# Altium PCB L293.PcbDoc
Units mm, origin at the board's own origin, x right, y up, seen from the top; angles counter-clockwise.
Board outline 39.88 x 31.91 mm, 2 copper layers (Top Layer, Bottom Layer); 22 components, 16 nets, 58 pads, 63 vias.
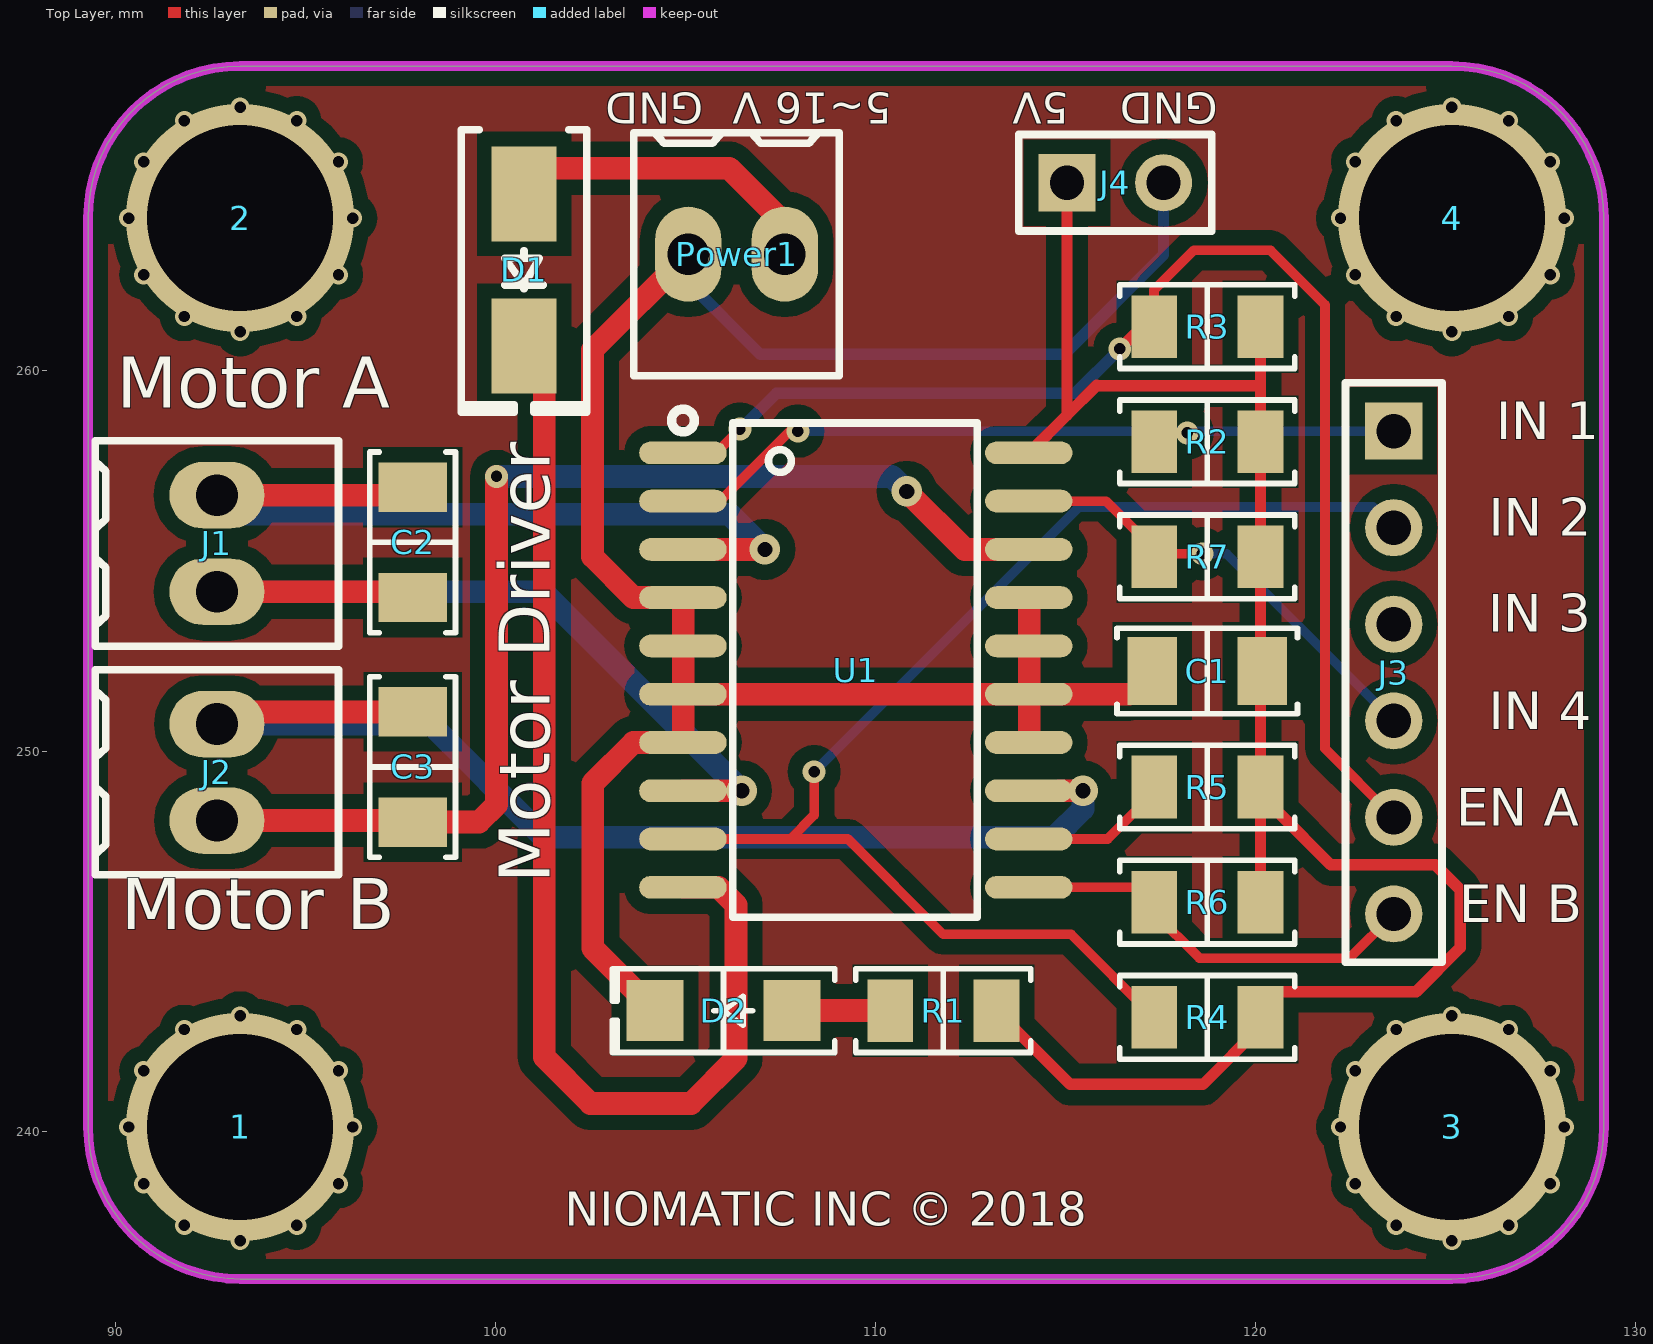
[diagram p0: Top Layer view]
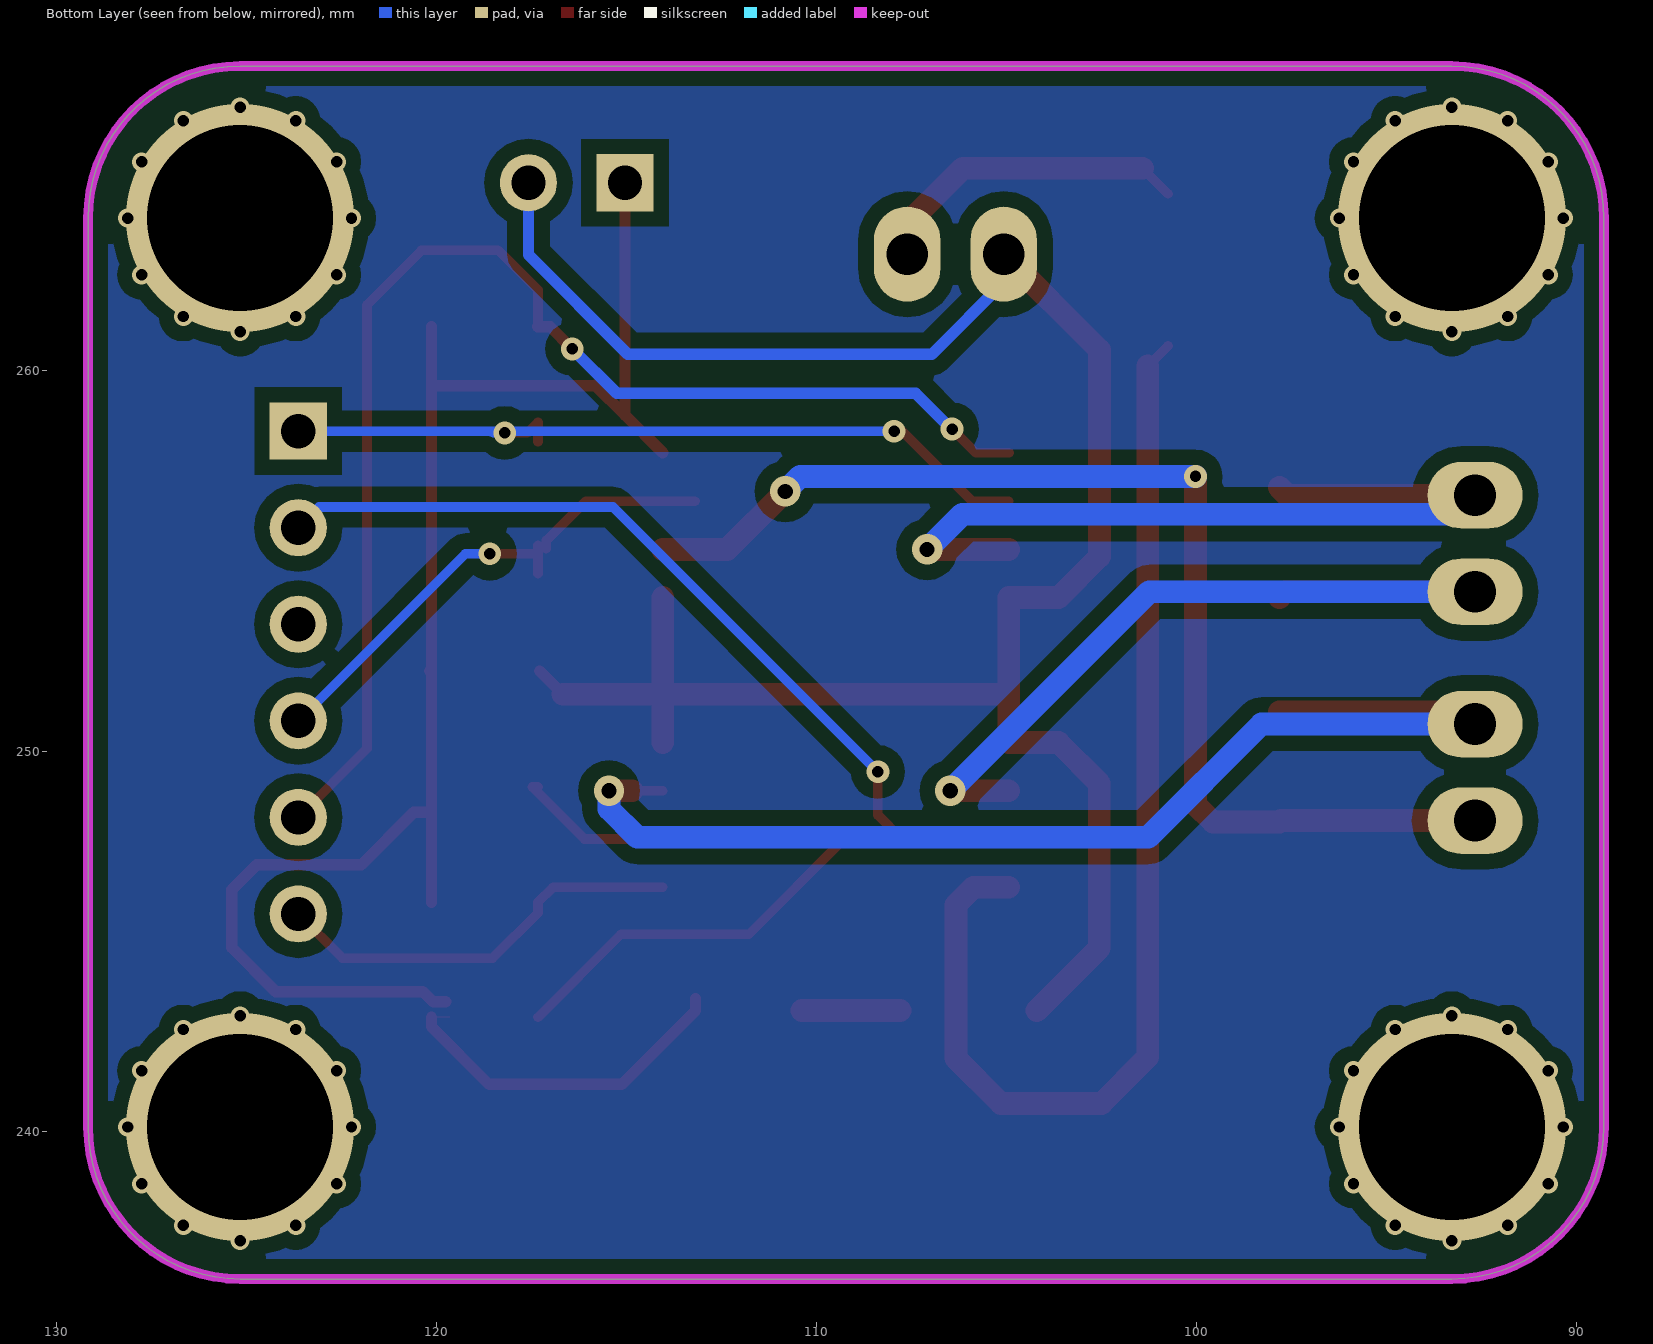
[diagram p1: Bottom Layer view, seen from below]
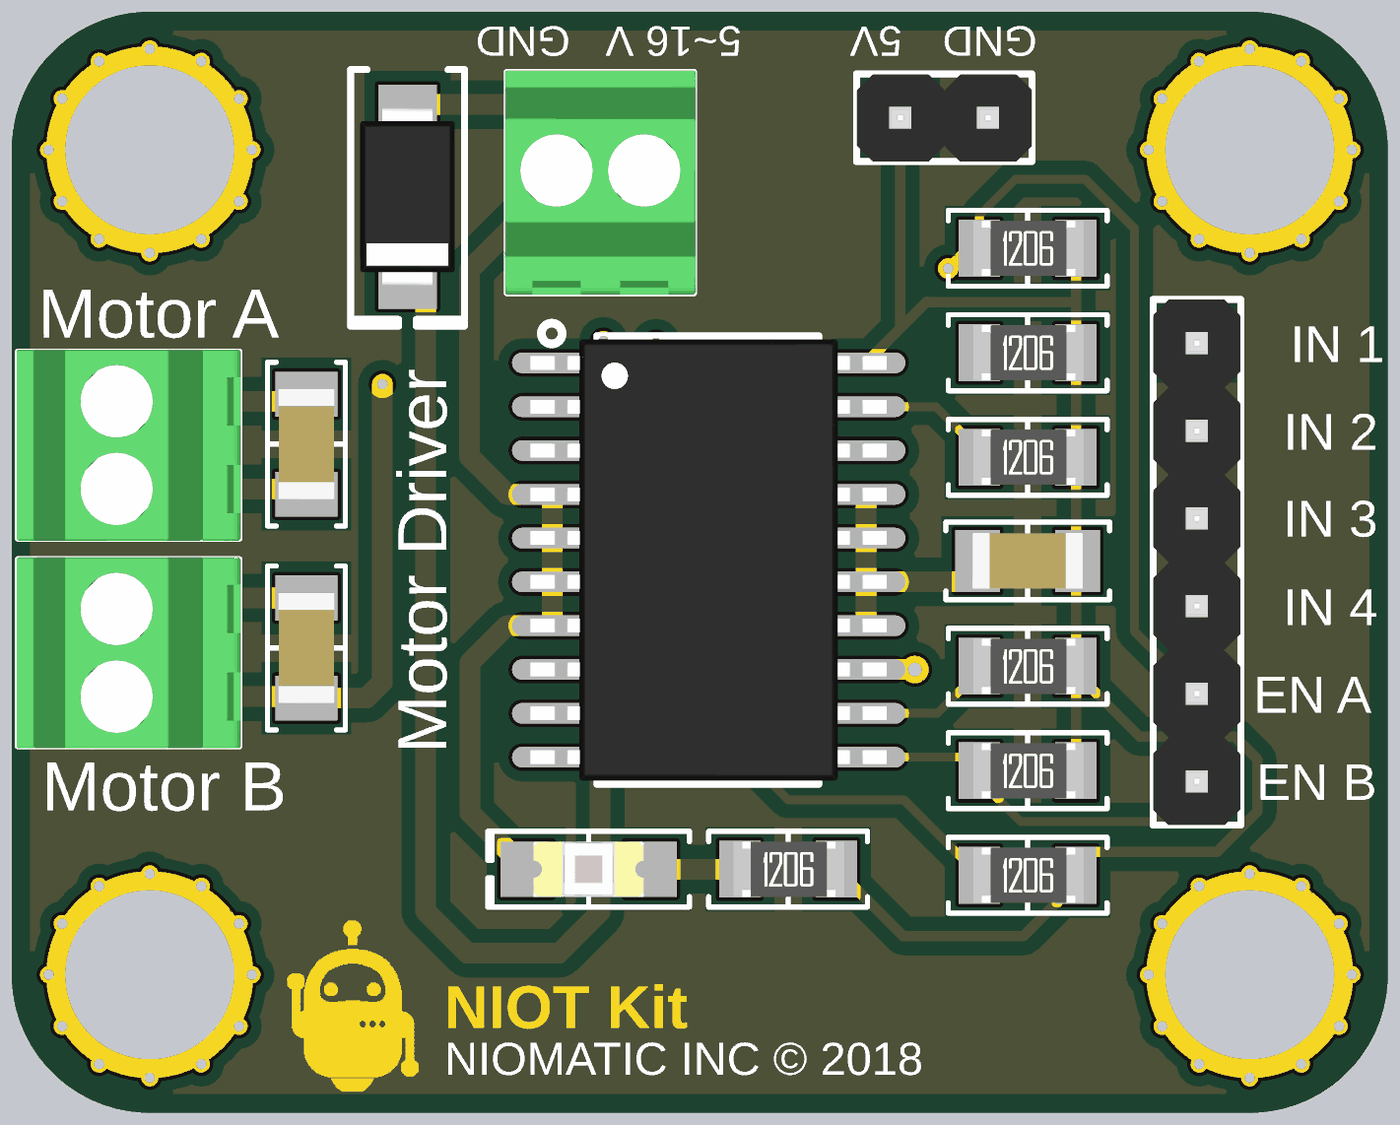
[diagram p2: 3D render of the assembled board from above, using the file's embedded part models]

## Layer stack, top to bottom
Top Solder: solder mask 0.0102, Solder Resist, Dk 3.5
Top Layer: signal copper 0.0356
Dielectric 1: dielectric 0.32, FR-4, Dk 4.8
Bottom Layer: signal copper 0.0356
Bottom Solder: solder mask 0.0102, Solder Resist, Dk 3.5

## Board outline
89.281,240.11 89.281,264.02 cw(c93.281,264.02) 93.281,268.02 125.16,268.02 cw(c125.16,264.02) 129.16,264.02 129.16,240.11 cw(c125.16,240.11) 125.16,236.11 93.281,236.11 cw(c93.281,240.11)

## Design rules (kind name [scope] priority, off if disabled: settings)
Clearance [All] p1: gap=0.4 ignorepadtopadclearanceinfootprint=FALSE
PolygonConnect [All] p1: connectstyle=Relief reliefconductorwidth=0.254 reliefentries=4 polygonreliefangle="90 Angle" airgapwidth=0.254
RoomDefinition L293 [InComponentClass('L293')] p1: confinementstyle=ConfineIn formatcopy=TRUE lockcomponents=FALSE outline 124.943,58.154 144.247,58.154 144.247,75.807 124.943,75.807
RoutingVias [All] p1: holewidth=0.3 width=0.6 viastyle="Through Hole" minholewidth=0.3 minwidth=0.6 maxholewidth=0.3 maxwidth=0.6
SMDNeckDown [All] p1: percent=50.000
SolderMaskExpansion [All] p1: expansion=0.102
UnConnectedPin [All] p1:
UnRoutedNet [All] p1: checkbadconnections=TRUE
Width [InNet('GND')] p1: maxlimit=0.3 minlimit=0.3 preferedwidth=0.3
Width Width_1 [InNet('VDD5V')] p2: maxlimit=0.3 minlimit=0.3 preferedwidth=0.3
Width Width_2 [InNet('VDD3V3')] p3: maxlimit=0.3 minlimit=0.3 preferedwidth=0.3
Width Width_3 [InNet('No Net')] p4: maxlimit=0.2 minlimit=0.2 preferedwidth=0.2
29 further rules are at their usual default settings.

## Components (designator, comment, footprint, x,y, rotation, side; value= is the part's Value field where it differs from the comment)
1 "Lego" "Lego Hole" 93.281,240.11 r90 top locked
2 "Lego" "Lego Hole" 93.281,264.02 r90 top locked
3 "Lego" "Lego Hole" 125.16,240.11 r90 top locked
4 "Lego" "Lego Hole" 125.16,264.02 r90 top locked
C1 "100nF" "CAP 1206/3216" 118.725,252.105 r0 top value=0.1uF
C2 "100nF" "CAP 1206/3216" 97.82,255.49 r90 top value=0.1uF
C3 "100nF" "CAP 1206/3216" 97.82,249.58 r90 top value=0.1uF
D1 "SS34" "DO214AC SMA" 100.75,262.66 r270 top
D2 "Green" "LED 1206/3216 RED" 106,243.17 r180 top
J1 "2 Pin" "TE 282834-2" 92.67,255.46 r90 top
J2 "2 Pin" "TE 282834-2" 92.67,249.44 r90 top
J3 "6 Pin" "HDR 1X6" 123.63,258.415 r270 top
J4 "2 Pin" "HDR 1X2" 115.034,264.95 r0 top
Power1 "Power" "TE 282834-2" 106.34,263.07 r0 top
R1 "1K" "RES 1206/3216" 111.78,243.17 r0 top
R2 "2K" "RES 1206/3216" 118.725,258.137 r0 top value=1K
R3 "2K" "RES 1206/3216" 118.725,261.165 r0 top value=1K
R4 "2K" "RES 1206/3216" 118.725,242.995 r0 top value=1K
R5 "2K" "RES 1206/3216" 118.725,249.052 r0 top value=1K
R6 "2K" "RES 1206/3216" 118.725,246.023 r0 top value=1K
R7 "2K" "RES 1206/3216" 118.725,255.108 r0 top value=1K
U1 "L293DD" SOIC127P1030-20N 109.48,252.13 r0 top

## Footprints (in the part's own frame and the unit in brackets; to place one, negate y for a bottom-side part, rotate by r counter-clockwise, add the part's x,y. Pads: shape width x height; smd on the part's side, far side on the other; paste and mask are expansions set on the pad)
"CAP 1206/3216" [mm] "Chip Capacitor, 2-Leads, Body 3.25x1.60mm, IPC Medium Density"
  rect 1.3x1.8 smd: 1(-1.45,0) 2(1.45,0)
  silkscreen extent -2.37,-1.12 2.37,1.12, body extent -1.6,-0.81 1.6,0.81, height 1.62
"DO214AC SMA" [mm] "Molded Diode, 2-Leads, Body 4.30x2.60mm, IPC Medium Density"
  rect 2.5x1.7 smd: 1(-2,0) 2(2,0)
  silkscreen extent -3.68,-1.65 3.75,1.65, body extent -2.6,-1.37 2.6,1.37, height 2.4
"HDR 1X2" [mm] "Connector; Header; 2 Position"
  rect 1.5x1.5 hole 0.9: 1(0,0)
  round 1.5 hole 0.9: 2(2.54,0)
  silkscreen extent -1.27,-1.27 3.81,1.27, body extent -1.26,-1.27 3.81,1.26, height 8.51
"HDR 1X6" [mm] "Connector; Header; 6 Position"
  rect 1.5x1.5 hole 0.9: 1(0,0)
  round 1.5 hole 0.9: 2(2.54,0) 3(5.08,0) 4(7.62,0) 5(10.16,0) 6(12.7,0)
  silkscreen extent -1.27,-1.27 13.97,1.27, body extent -1.26,-1.27 13.97,1.26, height 8.51
"LED 1206/3216 RED" [mm] "Chip Diode, 2-Leads, Body 3.13x1.55mm, IPC Medium Density"
  rect 1.5x1.6 smd: 1(-1.8,0) 2(1.8,0)
  silkscreen extent -2.92,-1.1 2.92,1.1, body extent -1.6,-0.8 1.6,0.8, height 0.9
"Lego Hole" [mm]
"RES 1206/3216" [mm] "Chip Resistor, 2-Leads, Body 3.13x1.55mm, IPC Medium Density"
  rect 1.2x1.65 smd: 1(-1.4,0) 2(1.4,0)
  silkscreen extent -2.3,-1.1 2.3,1.1, body extent -1.57,-0.8 1.62,0.8, height 0.6
SOIC127P1030-20N [mm] "SOIC, 20-Leads, Body 12.8x7.5mm, Pitch 1.27mm, IPC Medium Density"
  oval 2.3x0.6 smd: 1(-4.55,5.715) 2(-4.55,4.445) 3(-4.55,3.175) 4(-4.55,1.905) 5(-4.55,0.635) 6(-4.55,-0.635) 7(-4.55,-1.905) 8(-4.55,-3.175) 9(-4.55,-4.445) 10(-4.55,-5.715) 11(4.55,-5.715) 12(4.55,-4.445) 13(4.55,-3.175) 14(4.55,-1.905) 15(4.55,-0.635) 16(4.55,0.635) 17(4.55,1.905) 18(4.55,3.175) 19(4.55,4.445) 20(4.55,5.715)
  silkscreen extent -4.85,-6.5 3.19,6.86, body extent -5.16,-6.4 5.16,6.4, height 2.65
"TE 282834-2" [mm]
  oval 1.75x2.5 hole 1.1: 1(-1.27,0) 2(1.27,0)
  silkscreen extent -2.7,-3.2 2.7,3.2, body extent -2.77,-3.25 2.77,3.25, height 10

## Part data
C1 C2 C3: library part Capacitor, "SMT Capacitor"
D1: library part Diode, "Rectifier Diode"
D2: library part LED, "Chip LED"
Power1: library part "2 Pin"
R1 R2 R3 R4 R5 R6 R7: library part Resistor, "SMT Resistor"
U1: "IC MOTOR DRIVER PAR 20-SOIC", Package="SOIC-20 STMicroelectronics", Availability=Good, MF=STMicroelectronics, MP=L293DD, Price="3.02 USD"

## Via types
v1: diameter 0.5, hole 0.3, Top Layer to Bottom Layer, 48 vias
v2: diameter 0.6, hole 0.3, Top Layer to Bottom Layer, 7 vias
v3: diameter 6, hole 4.9, Top Layer to Bottom Layer, 4 vias
v4: diameter 0.8, hole 0.4, Top Layer to Bottom Layer, 4 vias

## Nets (pads, with @x,y where several pads share a name; then routed paths per layer and width w, separated by ;. In a path a pad name is that pad's centre, name@x,y a point inside that pad or via, vN(x,y) a via of type N, cw(c..) or ccw(c..) an arc to the next point about the centre after c; other vN are vias at no path point)
"EN A": J3.5 R3.1 U1.1 | length 34.5
  Top Layer w0.254: U1.1 105.805,257.845 v2(106.43,258.47) ; R3.1 117.325,262.128 118.367,263.17 120.39,263.17 121.82,261.74 121.82,250.065 J3.5
  Top Layer w0.3: v2(116.42,260.58) 117.005,261.165 R3.1
  Bottom Layer w0.3: v2(106.43,258.47) 106.45,258.47 107.39,259.41 115.25,259.41 v2(116.42,260.58)
"EN B": J3.6 R6.1 U1.11 | length 11
  Top Layer w0.254: U1.11@114.04,246.415 116.933,246.415 R6.1 117.325,245.745 118.52,244.55 122.465,244.55 J3.6
GND: C1.1 D2.2 J4.2 Power1.1 U1.4 U1.5 U1.6 U1.7 U1.14 U1.15 U1.16 U1.17 | length 58.5
  Top Layer w0.3: C1.1@116.665,251.495 C1.1
  Top Layer w0.6: D2.2 102.56,244.81 102.56,249.153 103.632,250.225 U1.7 104.94,250.225 U1.6@104.94,251.495 ; Power1.1 102.55,260.55 102.55,255.117 103.632,254.035 U1.4 104.94,254.035 U1.6@104.94,251.495 ; U1.14@114.04,250.225 U1.15@114.04,251.495 ; U1.17@114.04,254.035 U1.15@114.04,251.495 ; C1.1@116.665,251.495 U1.15@114.04,251.495 ; U1.6@104.94,251.495 U1.15 U1.15@114.04,251.495
  Bottom Layer w0.3: Power1.1 105.07,262.33 106.96,260.44 114.96,260.44 117.574,263.054 J4.2
"IN 1": J3.1 R2.1 U1.2 | length 21.3
  Top Layer w0.254: U1.2@104.94,256.575 105.905,256.575 107.745,258.415 v2(107.955,258.415) ; R2.1 117.325,258.648 117.603,258.37 v2(118.2,258.37)
  Bottom Layer w0.254: v2(107.955,258.415) 118.546,258.415 ; v2(118.2,258.37) 118.501,258.37 118.546,258.415 ; J3.1 118.546,258.415
"IN 2": J3.2 R4.1 U1.9 | length 34.7
  Top Layer w0.254: U1.9@104.94,247.685 107.755,247.685 ; v2(108.382,249.453) 108.382,248.312 107.755,247.685 ; R4.1 115.14,245.18 111.776,245.18 109.271,247.685 107.755,247.685
  Bottom Layer w0.254: v2(108.382,249.453) 115.348,256.42 123.085,256.42 J3.2
"IN 3": J3.3
"IN 4": J3.4 R7.1 U1.19 | length 13.8
  Top Layer w0.254: U1.19@113.182,256.575 U1.19 116.065,256.575 117.103,255.537 R7.1@117.103,255.33 ; R7.1@117.325,254.67 R7.1 R7.1@117.325,255.405 ; R7.1@117.407,255.19 v2(118.59,255.19) ; J3.4@123.625,250.79 J3.4 J3.4@123.935,251.1
  Bottom Layer w0.254: v2(118.59,255.19) 119.235,255.19 J3.4
M1+: C2.2 J1.2 U1.3 | length 22.7
  Top Layer w0.6: J1.2 97.61,256.73 C2.2 ; U1.3@104.94,255.305 v4(107.086,255.305)
  Bottom Layer w0.254: J1.2 93.04,256.73 J1.2@93.04,256.23
  Bottom Layer w0.6: J1.2@93.04,256.23 106.161,256.23 v4(107.086,255.305)
M1-: C2.1 J1.1 U1.8 | length 22.7
  Top Layer w0.6: J1.1 97.67,254.19 C2.1 ; U1.8@104.94,248.955 v4(106.477,248.955)
  Bottom Layer w0.6: J1.1 101.242,254.19 v4(106.477,248.955)
M2+: C3.2 J2.2 U1.13 | length 31.5
  Top Layer w0.254: U1.13@114.04,248.955 U1.13@114.849,248.955
  Top Layer w0.6: J2.2 92.99,251.03 C3.2 ; U1.13@114.849,248.955 v4(115.455,248.955)
  Bottom Layer w0.6: J2.2 98.29,250.71 101.27,247.73 114.71,247.73 115.455,248.475 v4(115.455,248.955)
M2-: C3.1 J2.1 U1.18 | length 31
  Top Layer w0.6: J2.1 97.78,248.17 C3.1 99.568,248.13 100.025,248.587 v2(100.025,257.226) ; v4(110.82,256.83) 112.345,255.305 U1.18@114.04,255.305
  Bottom Layer w0.6: v2(100.025,257.226) 110.424,257.226 v4(110.82,256.83)
NetD2_1: D2.1 R1.1 | length 2.6
  Top Layer w0.6: D2.1 R1.1
NetR5_1: R5.1 U1.12 | length 4.1
  Top Layer w0.254: U1.12@114.04,247.685 116.103,247.685 117.47,249.052 R5.1
V_RAW: D1.1 Power1.2 | length 8.5
  Top Layer w0.254: D1.1 D1.1@101.42,265.33 ; Power1.2 Power1.2@107.61,263.87
  Top Layer w0.6: D1.1@101.42,265.33 106.15,265.33 Power1.2@107.61,263.87
VDD5V: C1.2 J4.1 R1.2 R2.2 R3.2 R4.2 R5.2 R6.2 R7.2 U1.20 | length 51.4
  Top Layer w0: R4.2@119.625,242.995 R4.2
  Top Layer w0.3: R1.2@113.18,243.49 R1.2 115.12,241.23 118.61,241.23 120.125,242.745 R4.2 ; U1.20@114.04,257.845 115.034,258.839 ; J4.1 115.034,258.839 ; R4.2@119.75,243.4 120.08,243.4 120.35,243.67 124.22,243.67 125.38,244.83 125.38,246.35 124.72,247.01 121.97,247.01 120.59,248.39 R5.2@120.125,248.39 ; R6.2 R5.2@120.125,248.39 ; R3.2 120.125,259.62 ; 115.034,258.839 115.815,259.62 115.821,259.62 115.831,259.61 120.115,259.61 120.125,259.62 ; R5.2@120.125,248.39 R5.2 120.125,252.055 C1.2 120.125,252.155 R7.2 R2.2 120.125,259.62
VIN: D1.2 U1.10 | length 30.6
  Top Layer w0.254: D1.2 D1.2@101.28,260.13
  Top Layer w0.6: D1.2@101.28,260.13 101.28,241.95 102.5,240.73 105.14,240.73 106.33,241.92 106.33,245.95 105.865,246.415 U1.10@104.94,246.415
copper on no net:
  other v1: 93.281,237.121 125.16,237.121 91.815,237.521 94.775,237.521 123.694,237.521 126.655,237.521 90.743,238.616 95.869,238.616 122.622,238.615 127.749,238.615 90.351,240.11 96.241,240.11 122.23,240.11 128.12,240.11 90.743,241.591 95.869,241.591 122.622,241.591 127.749,241.591 91.815,242.674 94.775,242.674 123.694,242.674 126.655,242.674 93.281,243.031 125.16,243.031 93.281,261.031 125.16,261.031 91.815,261.431 94.775,261.431 123.694,261.431 126.655,261.431 90.743,262.526 95.869,262.526 122.622,262.526 127.749,262.526 90.351,264.02 96.241,264.02 122.23,264.02 128.12,264.02 90.743,265.501 95.869,265.501 122.622,265.501 127.749,265.501 91.815,266.584 94.775,266.584 123.694,266.584 126.655,266.584 93.281,266.941 125.16,266.941
  other v3: 93.281,240.11 125.16,240.11 93.281,264.02 125.16,264.02

## Polygon pours and split planes (outlines as drawn)
no net on Bottom Layer "Top Layer-No Net1" (solid, pour order 1): 89.281,240.11 89.281,264.02 cw(c93.281,264.02) 93.281,268.02 125.16,268.02 cw(c125.16,264.02) 129.16,264.02 129.16,240.11 cw(c125.16,240.11) 125.16,236.11 93.281,236.11 cw(c93.281,240.11)
no net on Top Layer "Top Layer-No Net" (solid, pour order 0): 89.281,240.11 89.281,264.02 cw(c93.281,264.02) 93.281,268.02 125.16,268.02 cw(c125.16,264.02) 129.16,264.02 129.16,240.11 cw(c125.16,240.11) 125.16,236.11 93.281,236.11 cw(c93.281,240.11)

## Keep-outs
Keep-Out Layer:
  lines w0.254: 89.281,240.11 ccw(c93.281,240.11) 93.281,236.11 125.16,236.11 ccw(c125.16,240.11) 129.16,240.11 129.16,264.02 ccw(c125.16,264.02) 125.16,268.02 93.281,268.02 ccw(c93.281,264.02) 89.281,264.02 89.281,240.11

## Silkscreen, mask and mechanical layers (free items; w line width, h text height)
Top Overlay:
  region: 200.59,260.19
  text "GND" at 105.47,267.596 h1.4 r180
  text "5~16 V" at 110.43,267.596 h1.4 r180
  text "5V" at 115.08,267.596 h1.4 r180
  text "GND" at 118.998,267.596 h1.4 r180
  text "Motor A" at 90.04,258.58 h2.3
  text "IN 1" at 126.333,257.869 h1.7
  text "IN 2" at 126.133,255.329 h1.7
  text "IN 3" at 126.122,252.808 h1.7
  text "IN 4" at 126.127,250.25 h1.7
  text "EN A" at 125.27,247.711 h1.7
  text "Motor Driver" at 101.88,246.52 h2.3 r90
  text "EN B" at 125.352,245.171 h1.7
  text "Motor B" at 90.151,244.87 h2.3
  text "NIOMATIC INC © 2018" at 101.82,237.209 h1.52
Top Solder:
  drawing of 379 lines, arcs and shapes, not listed
  text "NIOT Kit" at 101.82,238.56 h2